# EAGLE board AP4BP-Module-CarrierBreakout_rev_a v3 (EAGLE 9.7.0)
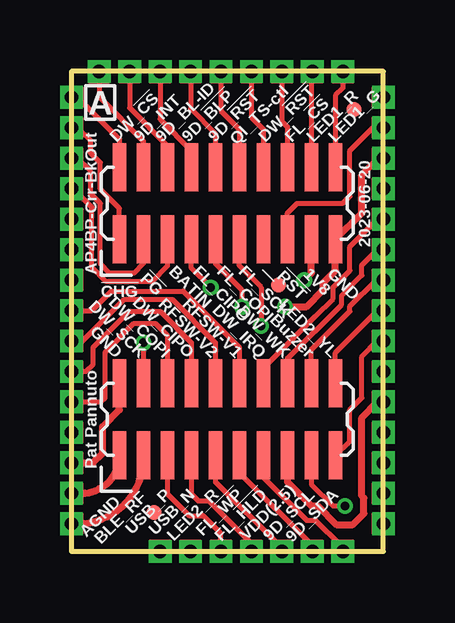
[diagram p0: board, top side]
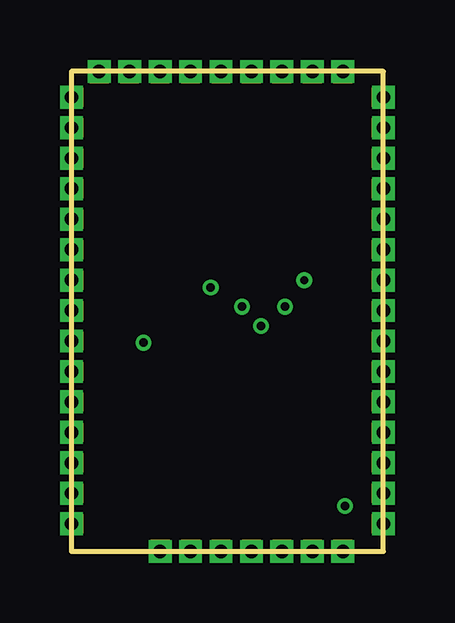
[diagram p1: board, inner layer Route2]
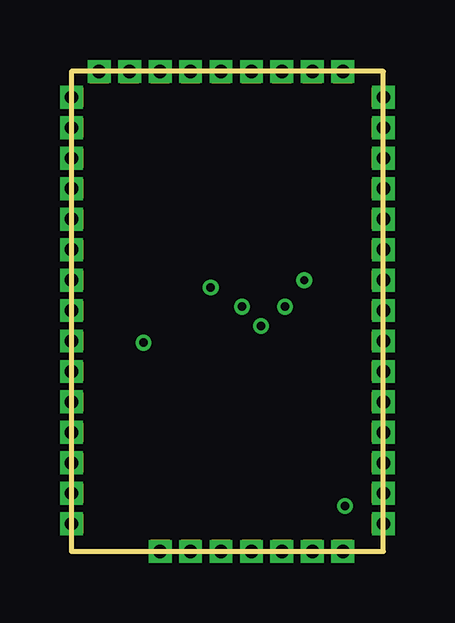
[diagram p2: board, inner layer Route15]
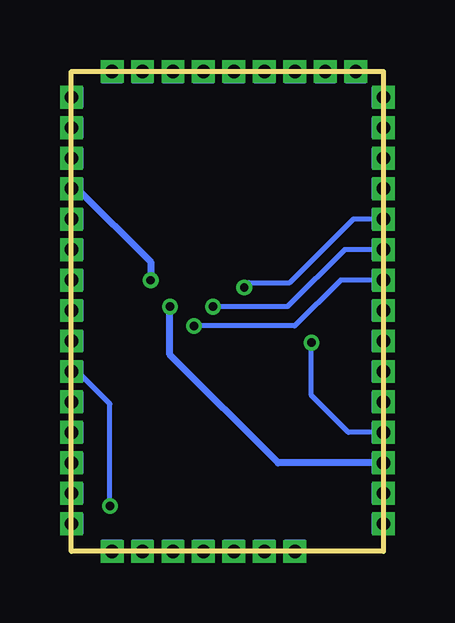
[diagram p3: board, bottom side, seen from below]

Size 13 x 20 mm. Coordinates in mm from the lower left corner, seen from the top.
Outline: 0,0 13,0 13,20 0,20 0,0
Copper layers (1*16): Top 0.0356mm / dielectric 0.18mm / Bottom 0.0356mm
Design rules "quickturn_co_kr_1oz_4lyr *": minimum track width 6mil, minimum drill 8mil, track to track 6mil, track to pad 6mil, pad to pad 6mil, via to via 12mil, smd to smd 6mil, copper to edge 12mil, drill to drill 12mil, minimum pad ring 8mil, minimum via ring 6mil, stop-mask expansion 4mil, vias tented up to drill 10mil, thermal gap 10mil
Net classes: 1 USB_PHY: width 0.152 mm, clearance 0.305 mm; 2 BLE_PHY: width 0.203 mm, clearance 0.095 mm

## Footprints (pad centres in the part's own frame; a part is rotated, then mirrored left to right if it is on the bottom)
FIDUCIAL-MICRO = smd 0.635 x 0.635: 1 0,0
PINHEAD-SMD-1MM-2X10 = smd 0.55 x 2: P1 -4.5,-1.5; P2 -3.5,-1.5; P3 -2.5,-1.5; P4 -1.5,-1.5; P5 -0.5,-1.5; P6 0.5,-1.5; P7 1.5,-1.5; P8 2.5,-1.5; P9 3.5,-1.5; P10 4.5,-1.5; P11 4.5,1.5; P12 3.5,1.5; P13 2.5,1.5; P14 1.5,1.5; P15 0.5,1.5; P16 -0.5,1.5; P17 -1.5,1.5; P18 -2.5,1.5; P19 -3.5,1.5; P20 -4.5,1.5
CASTELLATION-0.55MM_DRILL-4L = drill 0.55 pad 0.9 square: P$1 0,0 | smd 0.5 x 0.9: P$2 0.25,0 | smd 0.5 x 0.9 bottom: P$3 0.25,0

## Placement (x,y rotation side)
FD1  FIDUCIALUFIDUCIAL  [FIDUCIAL-MICRO]  3.44,1.63 0 top
FD2  FIDUCIALUFIDUCIAL  [FIDUCIAL-MICRO]  11.77,18.42 0 top
FD3  FIDUCIALUFIDUCIAL  [FIDUCIAL-MICRO]  8.62,11.11 0 top
J1  PINHEAD-SMD-1MM-2X10  [PINHEAD-SMD-1MM-2X10]  6.5,5.5 0 top
J2  PINHEAD-SMD-1MM-2X10  [PINHEAD-SMD-1MM-2X10]  6.5,14.5 0 top
P1  CASTELLATION4L  [CASTELLATION-0.55MM_DRILL-4L]  0,18.93 0 top
P2  CASTELLATION4L  [CASTELLATION-0.55MM_DRILL-4L]  0,17.66 0 top
P3  CASTELLATION4L  [CASTELLATION-0.55MM_DRILL-4L]  0,16.39 0 top
P4  CASTELLATION4L  [CASTELLATION-0.55MM_DRILL-4L]  0,15.12 0 top
P5  CASTELLATION4L  [CASTELLATION-0.55MM_DRILL-4L]  0,13.85 0 top
P6  CASTELLATION4L  [CASTELLATION-0.55MM_DRILL-4L]  0,12.58 0 top
P7  CASTELLATION4L  [CASTELLATION-0.55MM_DRILL-4L]  0,11.31 0 top
P8  CASTELLATION4L  [CASTELLATION-0.55MM_DRILL-4L]  0,10.04 0 top
P9  CASTELLATION4L  [CASTELLATION-0.55MM_DRILL-4L]  0,8.77 0 top
P10  CASTELLATION4L  [CASTELLATION-0.55MM_DRILL-4L]  0,7.5 0 top
P11  CASTELLATION4L  [CASTELLATION-0.55MM_DRILL-4L]  0,6.23 0 top
P12  CASTELLATION4L  [CASTELLATION-0.55MM_DRILL-4L]  0,4.96 0 top
P13  CASTELLATION4L  [CASTELLATION-0.55MM_DRILL-4L]  0,3.69 0 top
P14  CASTELLATION4L  [CASTELLATION-0.55MM_DRILL-4L]  0,2.42 0 top
P15  CASTELLATION4L  [CASTELLATION-0.55MM_DRILL-4L]  0,1.15 0 top
P18  CASTELLATION4L  [CASTELLATION-0.55MM_DRILL-4L]  3.69,0 90 top
P19  CASTELLATION4L  [CASTELLATION-0.55MM_DRILL-4L]  4.96,0 90 top
P20  CASTELLATION4L  [CASTELLATION-0.55MM_DRILL-4L]  6.23,0 90 top
P21  CASTELLATION4L  [CASTELLATION-0.55MM_DRILL-4L]  7.5,0 90 top
P22  CASTELLATION4L  [CASTELLATION-0.55MM_DRILL-4L]  8.77,0 90 top
P23  CASTELLATION4L  [CASTELLATION-0.55MM_DRILL-4L]  10.04,0 90 top
P24  CASTELLATION4L  [CASTELLATION-0.55MM_DRILL-4L]  11.31,0 90 top
P25  CASTELLATION4L  [CASTELLATION-0.55MM_DRILL-4L]  13,1.15 180 top
P26  CASTELLATION4L  [CASTELLATION-0.55MM_DRILL-4L]  13,2.42 180 top
P27  CASTELLATION4L  [CASTELLATION-0.55MM_DRILL-4L]  13,3.69 180 top
P28  CASTELLATION4L  [CASTELLATION-0.55MM_DRILL-4L]  13,4.96 180 top
P29  CASTELLATION4L  [CASTELLATION-0.55MM_DRILL-4L]  13,6.23 180 top
P30  CASTELLATION4L  [CASTELLATION-0.55MM_DRILL-4L]  13,7.5 180 top
P31  CASTELLATION4L  [CASTELLATION-0.55MM_DRILL-4L]  13,8.77 180 top
P32  CASTELLATION4L  [CASTELLATION-0.55MM_DRILL-4L]  13,10.04 180 top
P33  CASTELLATION4L  [CASTELLATION-0.55MM_DRILL-4L]  13,11.31 180 top
P34  CASTELLATION4L  [CASTELLATION-0.55MM_DRILL-4L]  13,12.58 180 top
P35  CASTELLATION4L  [CASTELLATION-0.55MM_DRILL-4L]  13,13.85 180 top
P36  CASTELLATION4L  [CASTELLATION-0.55MM_DRILL-4L]  13,15.12 180 top
P37  CASTELLATION4L  [CASTELLATION-0.55MM_DRILL-4L]  13,16.39 180 top
P38  CASTELLATION4L  [CASTELLATION-0.55MM_DRILL-4L]  13,17.66 180 top
P39  CASTELLATION4L  [CASTELLATION-0.55MM_DRILL-4L]  13,18.93 180 top
P40  CASTELLATION4L  [CASTELLATION-0.55MM_DRILL-4L]  11.31,20 270 top
P41  CASTELLATION4L  [CASTELLATION-0.55MM_DRILL-4L]  10.04,20 270 top
P42  CASTELLATION4L  [CASTELLATION-0.55MM_DRILL-4L]  8.77,20 270 top
P43  CASTELLATION4L  [CASTELLATION-0.55MM_DRILL-4L]  7.5,20 270 top
P44  CASTELLATION4L  [CASTELLATION-0.55MM_DRILL-4L]  6.23,20 270 top
P45  CASTELLATION4L  [CASTELLATION-0.55MM_DRILL-4L]  4.96,20 270 top
P46  CASTELLATION4L  [CASTELLATION-0.55MM_DRILL-4L]  3.69,20 270 top
P47  CASTELLATION4L  [CASTELLATION-0.55MM_DRILL-4L]  2.42,20 270 top
P48  CASTELLATION4L  [CASTELLATION-0.55MM_DRILL-4L]  1.15,20 270 top

## Library data of the parts
FD1-FD3 = SparkFun-Aesthetics
J1 J2 = connector; DESCRIPTION: SCL 1.0 HDR DRVT USP 020 SMT G3; DIGIKEY: 17-1MM-HU-D10-VS-00-H-TBP-ND; MANUFACTURER: TE Connectivity AMP Connectors; MPN: 1MM-HU-D10-VS-00-H-TBP
P1-P15 P18-P48 = connector

## Nets
+1V8: J2.P9 P36.P$1 P36.P$2 P36.P$3
AGND: J1.P1 P14.P$1 P14.P$2 P14.P$3
AP4_!RESET: J2.P8 P38.P$1 P38.P$2 P38.P$3
AP4_GP06/TT_FLASH_!HOLD: J1.P7 P24.P$1 P24.P$2 P24.P$3
AP4_GP08/TT_9DOF_SCL-COM1: J1.P9 P30.P$1 P30.P$2 P30.P$3
AP4_GP09/TT_9DOF_SDA-COM0: J1.P10 P31.P$1 P31.P$2 P31.P$3
AP4_GP13/TT_9DOF_!BL_PIN: J2.P17 P46.P$1 P46.P$2 P46.P$3
AP4_GP14/TT_9DOF_BL_IND: J2.P18 P47.P$1 P47.P$2 P47.P$3
AP4_GP17/TT_9DOF_INT: J2.P19 P48.P$1 P48.P$2 P48.P$3
AP4_GP18/TT_BATIN: J2.P3 P4.P$1 P4.P$2 P4.P$3
AP4_GP24/TT_RFSW_V1: J1.P15 P8.P$1 P8.P$2 P8.P$3
AP4_GP25/TT_RFSW_V2: J1.P16 P9.P$1 P9.P$2 P9.P$3
AP4_GP26/TT_DW_WAKEUP: J1.P13 P34.P$1 P34.P$2 P34.P$3
AP4_GP27/TT_DW_IRQ: J1.P14 P35.P$1 P35.P$2 P35.P$3
AP4_GP29/TT_!DW_SPI_CS: J2.P20 P1.P$1 P1.P$2 P1.P$3
AP4_GP30/TT_FLASH_!WP: J1.P6 P23.P$1 P23.P$2 P23.P$3
AP4_GP31/TT_DW_SPI_CLK: J1.P19 P12.P$1 P12.P$2 P12.P$3
AP4_GP32/TT_DW_SPI_IO0: J1.P18 P11.P$1 P11.P$2 P11.P$3
AP4_GP33/TT_DW_SPI_IO1: J1.P17 P10.P$1 P10.P$2 P10.P$3
AP4_GP47/TT_FLASH_SCK: J2.P6 P7.P$1 P7.P$2 P7.P$3
AP4_GP48/TT_FLASH_MOSI: J2.P5 P6.P$1 P6.P$2 P6.P$3
AP4_GP49/TT_FLASH_MISO: J2.P4 P5.P$1 P5.P$2 P5.P$3
AP4_GP50/TT_!DW_RESET: J2.P14 P43.P$1 P43.P$2 P43.P$3
AP4_GP51/LED1_GREEN: J2.P11 P40.P$1 P40.P$2 P40.P$3
AP4_GP53/LED1_RED: J2.P12 P41.P$1 P41.P$2 P41.P$3
AP4_GP55/TT_BUZZER_GATE: J1.P12 P33.P$1 P33.P$2 P33.P$3
AP4_GP58/TT_!CHG: J2.P1 P2.P$1 P2.P$2 P2.P$3
AP4_GP60/TT_!PG: J2.P2 P3.P$1 P3.P$2 P3.P$3
AP4_GP65/TT_9DOF_!RESET: J2.P16 P45.P$1 P45.P$2 P45.P$3
AP4_GP66/TT_QI_TS_CTRL: J2.P15 P44.P$1 P44.P$2 P44.P$3
AP4_GP69/TT_FLASH_!CS: J2.P13 P42.P$1 P42.P$2 P42.P$3
AP4_GP79/TT_LED2_RED: J1.P5 P22.P$1 P22.P$2 P22.P$3
AP4_GP88/TT_LED2_YELLOW: J1.P11 P32.P$1 P32.P$2 P32.P$3
AP4_USB0_N [USB_PHY]: J1.P4 P21.P$1 P21.P$2 P21.P$3
AP4_USB0_P [USB_PHY]: J1.P3 P20.P$1 P20.P$2 P20.P$3
AP4_VDDMIPI_1P8: P28.P$1 P28.P$2 P28.P$3
AP4_VDDUSB_0P9: P26.P$1 P26.P$2 P26.P$3
AP4_VDDUSB_3P3: P27.P$1 P27.P$2 P27.P$3
BLE_RFOUT [BLE_PHY]: J1.P2 P15.P$1 P15.P$2 P15.P$3
GND: J1.P20 J2.P10 P13.P$1 P13.P$2 P13.P$3 P37.P$1 P37.P$2 P37.P$3
P18_UNUSED: P18.P$1 P18.P$2 P18.P$3
P19_UNUSED: P19.P$1 P19.P$2 P19.P$3
P25_UNUSED: P25.P$1 P25.P$2 P25.P$3
P39_UNUSED: P39.P$1 P39.P$2 P39.P$3
VDD: J1.P8 P29.P$1 P29.P$2 P29.P$3

## Tracks (layer width: path | path; a pad name or v marks a point on that pad's centre or on a via)
+1V8  (via drill 0.35)
  Top 0.2: P36.P$3 P36.P$1
  Top 0.3: J2.P9 10,11.6 v9.7,11.3
  Bottom 0.2: P36.P$3 P36.P$1
  Bottom 0.3: P36.P$3 9.7,12.07 v9.7,11.3
AGND
  Top 0.2: P14.P$1 P14.P$3 0.42,2.42
  Top 0.3: 0.42,2.42 arc90 J1.P1
  Bottom 0.2: P14.P$3 P14.P$1
AP4_!RESET
  Top 0.2: P38.P$1 P38.P$3 12.56,17.66 11.6,16.7 11.6,14.8 11.3,14.5 9.4,14.5 9,14.1 J2.P8
  Bottom 0.2: P38.P$3 P38.P$1
AP4_GP06/TT_FLASH_!HOLD
  Top 0.2: P24.P$1 P24.P$2 11.21,0.25 10.16,1.3 9.8,1.3 8,3.1 J1.P7
  Bottom 0.2: P24.P$2 P24.P$1
AP4_GP08/TT_9DOF_SCL-COM1  (via drill 0.35)
  Top 0.2: P30.P$3 P30.P$1 | v11.4,1.9 10.9,1.9 10,2.8 J1.P9
  Bottom 0.2: P30.P$1 P30.P$3 11.4,6.15 v11.4,1.9
AP4_GP09/TT_9DOF_SDA-COM0
  Top 0.2: P31.P$1 P31.P$3 12.1,8.12 12.1,6.4 11.6,5.9 11.6,4.6 J1.P10
  Bottom 0.2: P31.P$3 P31.P$1
AP4_GP13/TT_9DOF_!BL_PIN
  Top 0.2: P46.P$2 3.69,18.01 5,16.7 J2.P17
  Top 0.3: P46.P$2 P46.P$1
  Bottom 0.3: P46.P$2 P46.P$1
AP4_GP14/TT_9DOF_BL_IND
  Top 0.2: P47.P$2 2.42,18.48 4,16.9 J2.P18
  Top 0.3: P47.P$2 P47.P$1
  Bottom 0.3: P47.P$2 P47.P$1
AP4_GP17/TT_9DOF_INT
  Top 0.2: P48.P$2 1.15,18.95 3,17.1 J2.P19
  Top 0.3: P48.P$2 P48.P$1
  Bottom 0.3: P48.P$2 P48.P$1
AP4_GP18/TT_BATIN
  Top 0.2: P4.P$1 P4.P$2 0.25,14.95 0.85,14.35 0.85,11.85 1.45,11.25 3.35,11.25 4,11.9 J2.P3
  Bottom 0.2: P4.P$2 P4.P$1
AP4_GP24/TT_RFSW_V1
  Top 0.2: P8.P$1 P8.P$2 0.84,10.04 1.65,10.85 4.65,10.85 7,8.5 J1.P15
  Bottom 0.2: P8.P$2 P8.P$1
AP4_GP25/TT_RFSW_V2
  Top 0.2: P9.P$1 P9.P$2 0.47,8.77 2.2,10.5 4.2,10.5 6,8.7 J1.P16
  Bottom 0.2: P9.P$2 P9.P$1
AP4_GP26/TT_DW_WAKEUP
  Top 0.2: P34.P$1 P34.P$3 12.1,11.93 12.1,11.5 11.26,10.65 11.26,10.29 9,8.03 J1.P13
  Bottom 0.2: P34.P$3 P34.P$1
AP4_GP27/TT_DW_IRQ
  Top 0.2: P35.P$1 P35.P$3 11.6,12.7 11.6,11.7 10.9,11 10.9,10.53 10.17,9.8 8,7.63 J1.P14
  Route15 0.152: 12.66,13.51 P35.P$1
  Bottom 0.2: P35.P$3 P35.P$1
AP4_GP29/TT_!DW_SPI_CS
  Top 0.2: P1.P$1 P1.P$2 2,17.18 J2.P20
  Bottom 0.2: P1.P$2 P1.P$1
AP4_GP30/TT_FLASH_!WP
  Top 0.2: P23.P$1 P23.P$2 7,3.29 J1.P6
  Bottom 0.2: P23.P$2 P23.P$1
AP4_GP31/TT_DW_SPI_CLK  (via drill 0.35)
  Top 0.2: P12.P$2 P12.P$1 | v3,8.7 J1.P19
  Bottom 0.2: P12.P$1 P12.P$2 1.46,4.96 3,6.5 v3,8.7
AP4_GP32/TT_DW_SPI_IO0
  Top 0.2: P11.P$1 P11.P$2 1.23,6.23 1.4,6.4 1.4,8.3 2.6,9.5 3.5,9.5 4,9 J1.P18
  Bottom 0.2: P11.P$2 P11.P$1
AP4_GP33/TT_DW_SPI_IO1
  Top 0.2: P10.P$1 P10.P$2 0.6,7.5 0.9,7.8 0.9,8.5 2.4,10 3.7,10 5,8.7 J1.P17
  Bottom 0.2: P10.P$2 P10.P$1
AP4_GP47/TT_FLASH_SCK  (via drill 0.35)
  Top 0.2: P7.P$2 P7.P$1 | J2.P6 7,11.9 7.9,11 v7.9,9.4
  Bottom 0.2: P7.P$1 P7.P$2 1.79,11.31 3.7,9.4 v7.9,9.4
AP4_GP48/TT_FLASH_MOSI  (via drill 0.35)
  Top 0.2: P6.P$2 P6.P$1 | J2.P5 6,12 7.1,10.9 v7.1,10.2
  Bottom 0.2: P6.P$1 P6.P$2 1.62,12.58 4,10.2 v7.1,10.2
AP4_GP49/TT_FLASH_MISO  (via drill 0.35)
  Top 0.2: P5.P$2 P5.P$1 | v5.8,11 5,11.8 J2.P4
  Bottom 0.2: P5.P$1 P5.P$2 1.25,13.85 3.9,11.2 5.6,11.2 v5.8,11
AP4_GP50/TT_!DW_RESET
  Top 0.2: P43.P$2 7.5,18.1 8,17.6 J2.P14
  Top 0.3: P43.P$2 P43.P$1
  Bottom 0.3: P43.P$2 P43.P$1
AP4_GP51/LED1_GREEN
  Top 0.2: P40.P$2 11.31,19.31 11,19 J2.P11
  Top 0.3: P40.P$2 P40.P$1
  Bottom 0.3: P40.P$2 P40.P$1
AP4_GP53/LED1_RED
  Top 0.2: P41.P$2 10,19.71 J2.P12
  Top 0.3: P41.P$2 P41.P$1
  Bottom 0.3: P41.P$2 P41.P$1
AP4_GP55/TT_BUZZER_GATE
  Top 0.2: P33.P$1 P33.P$2 12.7,11.31 11.6,10.21 11.6,10 10,8.4 J1.P12
  Route2 0.152: P33.P$2 P33.P$1
  Bottom 0.2: P33.P$2 P33.P$1
AP4_GP58/TT_!CHG
  Top 0.2: P2.P$1 P2.P$2 0.8,17.11 0.8,16.6 1.2,16.2 1.2,15.1 2,14.3 J2.P1
  Bottom 0.2: P2.P$2 P2.P$1
AP4_GP60/TT_!PG
  Top 0.2: P3.P$1 P3.P$2 0.8,15.84 0.8,14.9 1.2,14.5 1.2,12 1.6,11.6 2.6,11.6 3,12 J2.P2
  Bottom 0.2: P3.P$2 P3.P$1
AP4_GP65/TT_9DOF_!RESET
  Top 0.2: P45.P$3 4.96,18.44 6,17.4 J2.P16
  Top 0.3: P45.P$3 P45.P$1
  Bottom 0.3: P45.P$3 P45.P$1
AP4_GP66/TT_QI_TS_CTRL
  Top 0.2: P44.P$3 6.23,18.37 7,17.6 J2.P15
  Top 0.3: P44.P$3 P44.P$1
  Bottom 0.3: P44.P$3 P44.P$1
AP4_GP69/TT_FLASH_!CS
  Top 0.2: P42.P$2 8.77,17.93 9,17.7 J2.P13
  Top 0.3: P42.P$2 P42.P$1
  Bottom 0.3: P42.P$2 P42.P$1
AP4_GP79/TT_LED2_RED
  Top 0.2: P22.P$1 P22.P$3 8.65,0.25 6,2.9 J1.P5
  Bottom 0.2: P22.P$3 P22.P$1
AP4_GP88/TT_LED2_YELLOW
  Top 0.2: P32.P$1 P32.P$2 11,8.29 J1.P11
  Bottom 0.2: P32.P$2 P32.P$1
AP4_USB0_N
  Top 0.2: P21.P$1 P21.P$2 7.5,0.35 5.75,2.1 5.3,2.1 5,2.4 J1.P4
  Bottom 0.2: P21.P$2 P21.P$1
AP4_USB0_P
  Top 0.2: P20.P$1 P20.P$2 6.23,0.75 5.49,1.5 4.91,1.5 4,2.4 J1.P3
  Bottom 0.2: P20.P$2 P20.P$1
AP4_VDDMIPI_1P8
  Top 0.2: P28.P$1 P28.P$3
  Bottom 0.2: P28.P$3 P28.P$1
AP4_VDDUSB_0P9
  Top 0.2: P26.P$3 P26.P$1
  Bottom 0.2: P26.P$3 P26.P$1
AP4_VDDUSB_3P3
  Top 0.2: P27.P$3 P27.P$1
  Bottom 0.2: P27.P$3 P27.P$1
BLE_RFOUT
  Top 0.3: P15.P$1 P15.P$3 P15.P$3 arc90 3,3.89 J1.P2
  Bottom 0.3: P15.P$3 P15.P$1
GND  (via drill 0.35)
  Top 0.2: P37.P$3 12.8,16.39 P37.P$1 | P13.P$3 P13.P$1
  Top 0.3: P13.P$3 0.89,3.69 1.3,4.1 1.3,5.2 2,5.9 J1.P20 | 12.8,16.39 12.1,15.69 12.1,14.1 J2.P10 11,11.7 10.5,11.2 10.5,10.9 9.8,10.2 v8.9,10.2
  Bottom 0.2: P37.P$3 P37.P$1 | P13.P$3 P13.P$1
  Bottom 0.3: P13.P$3 4.39,3.69 8.9,8.2 v8.9,10.2
P18_UNUSED
  Top 0.2: P18.P$3 P18.P$1
  Bottom 0.2: P18.P$3 P18.P$1
P19_UNUSED
  Top 0.2: P19.P$3 P19.P$1
  Bottom 0.2: P19.P$3 P19.P$1
P25_UNUSED
  Top 0.2: P25.P$3 P25.P$1
  Bottom 0.2: P25.P$3 P25.P$1
P39_UNUSED
  Top 0.2: P39.P$2 P39.P$1
  Bottom 0.2: P39.P$2 P39.P$1
VDD
  Top 0.2: P29.P$3 P29.P$1 | 12.18,2.22 12.1,2.31
  Top 0.3: J1.P8 9,2.9 10,1.9 10.26,1.9 11.04,1.12 11.72,1.12 12.18,1.58 12.18,2.22 | P29.P$3 12.1,5.58 12.1,2.31
  Route15 0.203: P29.P$1 12.97,6.23
  Bottom 0.2: P29.P$3 P29.P$1

## Text on the board
tPlace: A | DW_!CS | 9D_INT | 9D_BL-ID | 9D_!BLP | 9D_!RST | QI_TS-ctl | DW_!RST | FL_!CS | LED1_R | LED1_G | AP4BP-Crr-BkOut | 2023-06-20 | !PG | BATIN | FL_CIPO | FL_COPI | FL_SCK | — | !RST | 1V8 | GND | !CHG | GND | DW_SCK | DW_COPI | DW_CIPO | RFSW-V2 | RFSW-V1 | DW_IRQ | DW_WK | Buzzer | LED2_YL | Pat Pannuto | VDD(2.5) | AGND | BLE_RF | USB_P | USB_N | LED2_R | FL_!WP | FL_!HLD | 9D_SCL | 9D_SDA